# EAGLE board Light_Sensor_Layout (EAGLE 9.7.0)
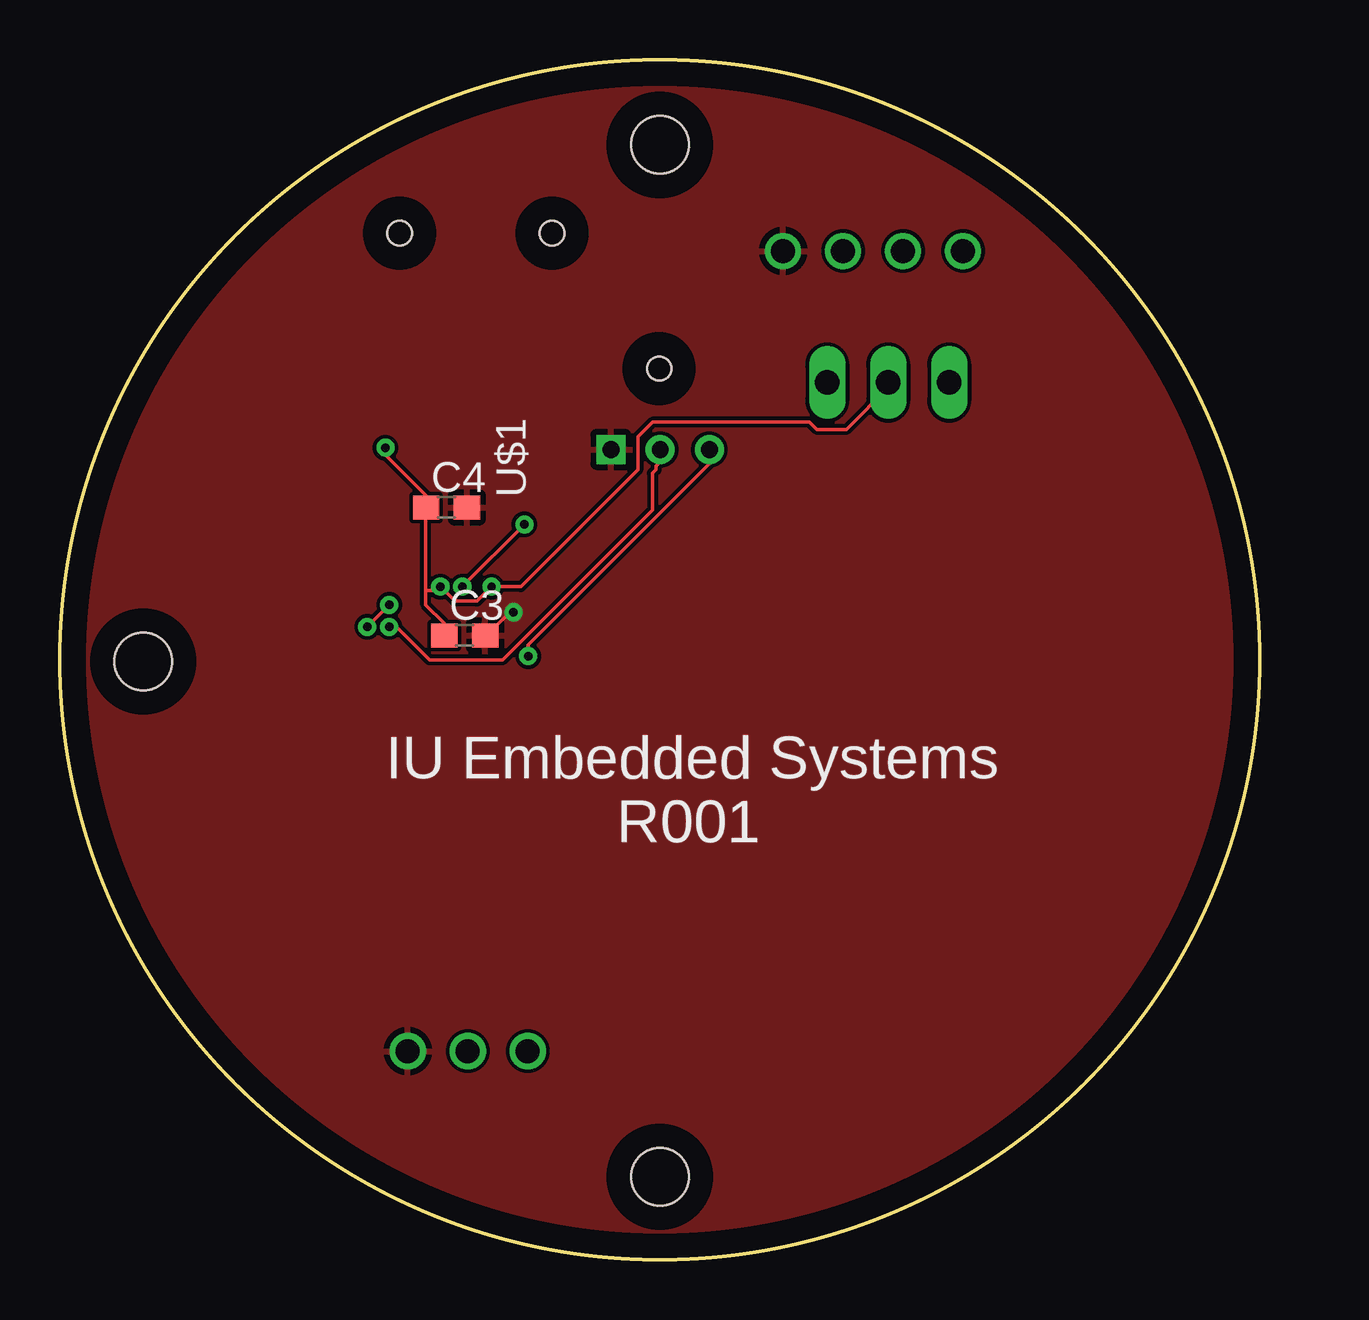
[diagram p0: board, top side]
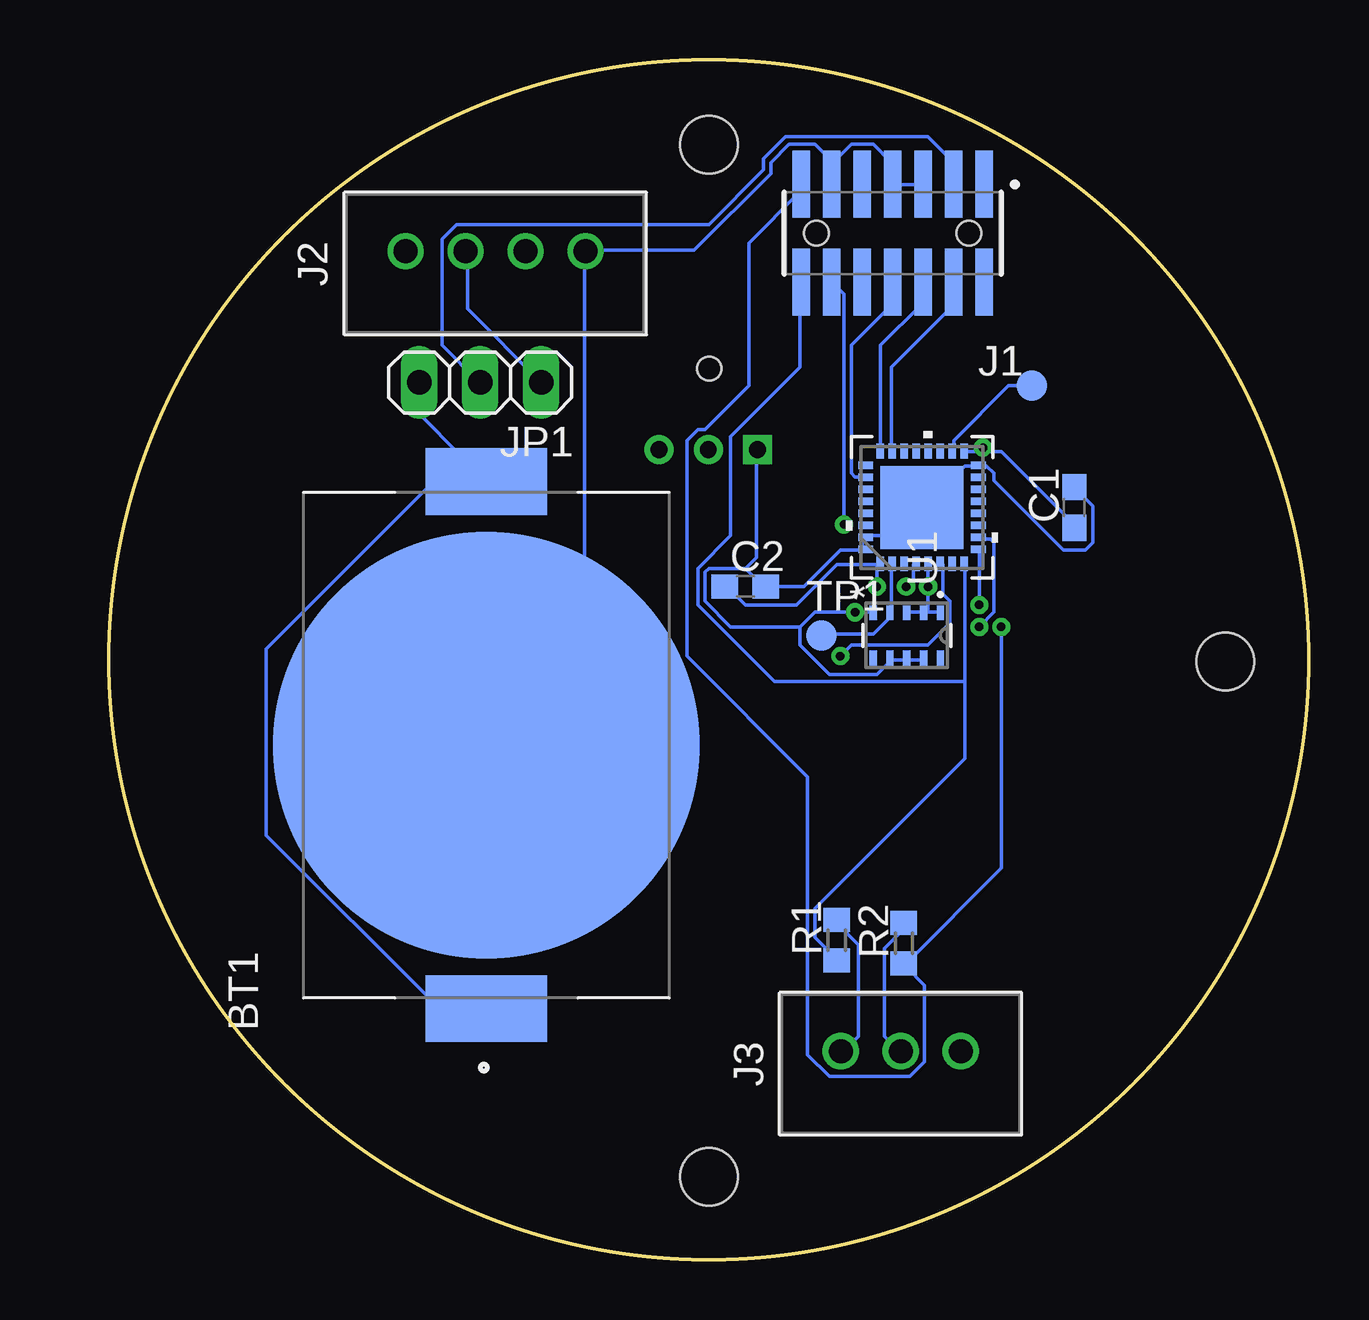
[diagram p1: board, bottom side, seen from below]

Size 50 x 50 mm. Coordinates in mm from the lower left corner, seen from the top.
Outline: circle at 25,25 radius 25
Copper layers (1*16): Top 0.035mm / dielectric 1.5mm / Bottom 0.035mm
Design rules "Fusion Electronics Design Rules": minimum track width 6mil, minimum drill 0.35mm, track to track 6mil, track to pad 6mil, pad to pad 6mil, via to via 6mil, smd to smd 6mil, copper to edge 40mil, drill to drill 6mil, minimum pad ring 10mil, minimum via ring 8mil, stop-mask expansion 4mil, vias tented up to drill 9999mil, thermal gap 10mil
Holes 2.4 mm at 25,46.46 3.47,24.93 25,3.45
Holes 1 mm at 24.97,37.14

## Footprints (pad centres in the part's own frame; a part is rotated, then mirrored left to right if it is on the bottom)
MPD_BK-912-TR = smd 2.79 x 5.08: 1 -10.985,0; 2 10.985,0 | smd 17.78 x 17.78: 3 0,0
C0603 = smd 1.1 x 1: 1 -0.85,0; 2 0.85,0
SAMTEC_FTSH-107-01-L-DV-A-TR = smd 0.74 x 2.79: 01 -3.81,-2.035; 02 -3.81,2.035; 03 -2.54,-2.035; 04 -2.54,2.035; 05 -1.27,-2.035; 06 -1.27,2.035; 07 0,-2.035; 08 0,2.035; 09 1.27,-2.035; 10 1.27,2.035; 11 2.54,-2.035; 12 2.54,2.035; 13 3.81,-2.035; 14 3.81,2.035 | hole 1.02: -3.175,0; 3.175,0
B4B-XH-A = drill 1: 1 0.525,3.75; 2 0.525,1.25; 3 0.525,-1.25; 4 0.525,-3.75
B3B-XH-A = drill 1: 1 0.525,2.5; 2 0.525,0; 3 0.525,-2.5
1X03 = drill 1.016 long: 1 -2.54,0; 2 0,0; 3 2.54,0
R0603 = smd 1 x 1.1: 1 -0.85,0; 2 0.85,0
B1,27 = smd 1.27 x 1.27: TP 0,0
UFQFPN32-5X5MM = smd 0.61 x 0.305: 1 -2.35,1.75; 2 -2.35,1.25; 3 -2.35,0.75; 4 -2.35,0.25; 5 -2.35,-0.25; 6 -2.35,-0.75; 7 -2.35,-1.25; 8 -2.35,-1.75; 17 2.35,-1.75; 18 2.35,-1.25; 19 2.35,-0.75; 20 2.35,-0.25; 21 2.35,0.25; 22 2.35,0.75; 23 2.35,1.25; 24 2.35,1.75 | smd 0.305 x 0.61: 9 -1.75,-2.35; 10 -1.25,-2.35; 11 -0.75,-2.35; 12 -0.25,-2.35; 13 0.25,-2.35; 14 0.75,-2.35; 15 1.25,-2.35; 16 1.75,-2.35; 25 1.75,2.35; 26 1.25,2.35; 27 0.75,2.35; 28 0.25,2.35; 29 -0.25,2.35; 30 -0.75,2.35; 31 -1.25,2.35; 32 -1.75,2.35 | smd 3.454 x 3.454: 33 0,0
TSL237 = drill 0.7 square: P$1 0,0 | drill 0.7: P$2 0,-2.05; P$3 0,-4.1
TG-3541CE_32.7680KXB3_EPS = smd 0.61 x 0.305: 1 -0.945,1.4; 2 -0.945,0.7; 3 -0.945,0; 4 -0.945,-0.7; 5 -0.945,-1.4; 6 0.945,-1.4; 7 0.945,-0.7; 8 0.945,0; 9 0.945,0.7; 10 0.945,1.4

## Placement (x,y rotation side)
BT1  BK-912-TR  [MPD_BK-912-TR]  34.27,21.44 90 bottom
C1  0.1uF  [C0603]  9.76,31.35 90 bottom
C2  0.1uF  [C0603]  23.48,28.05 0 bottom
C3  1uF  [C0603]  16.87,26.02 0 top
C4  0.1uF  [C0603]  16.11,31.35 0 top
J1  FTSH-107-01-L-DV-A-TR  [SAMTEC_FTSH-107-01-L-DV-A-TR]  17.33,42.78 180 bottom
J2  B4B-XH-A  [B4B-XH-A]  33.89,41.51 90 bottom
J3  B3B-XH-A  [B3B-XH-A]  17,8.16 90 bottom
JP1  [1X03]  34.52,36.56 180 bottom
R1  200  [R0603]  19.67,13.32 90 bottom
R2  200  [R0603]  16.87,13.19 90 bottom
TP1  TPB1,27  [B1,27]  20.3,26.02 0 bottom
TP2  TPB1,27  [B1,27]  11.54,36.43 0 bottom
U1  STM32L432KX  [UFQFPN32-5X5MM]  16.11,31.35 90 bottom
U$1  TSL237  [TSL237]  22.97,33.76 90 top
XTAL1  TG-3541CE_32.7680KXB3TG-3541CE_32.7680KXB3_EPS  [TG-3541CE_32.7680KXB3_EPS]  16.74,26.02 270 bottom

## Library data of the parts
BT1 = Embedded_Systems_Components v3; MANUFACTURER: MPD; PARTREV: H; STANDARD: Manufacturer Recommendations
C1-C4 = rcl; SPICEPREFIX: C
J1 = Embedded_Systems_Components v3; MANUFACTURER: Samtec; PARTREV: R; STANDARD: Manufacturer Recommendations
J2 = Connector; CATEGORY: Connectors; DATASHEET: https://www.jst-mfg.com/product/pdf/eng/eXH.pdf; DESCRIPTION: Connector Header Through Hole 4 position 0.098" (2.50mm); MANUFACTURER: JST Sales America Inc.; MPN: B4B-XH-A; OPERATING_TEMPERATURE: -25°C ~ 85°C; PACKAGE_SIZE: NA; PACKAGE_TYPE: Through Hole; PART_STATUS: Active; PITCH: 0.098" (2.50mm); ROHS: Compliant; SERIES: XH; SUBCATEGORY: Rectangular Connectors; TYPE: Male Headers
J3 = Connector; CATEGORY: Connectors; DATASHEET: https://www.jst-mfg.com/product/pdf/eng/eXH.pdf; DESCRIPTION: Connector Header Through Hole 3 position 0.098" (2.50mm); MANUFACTURER: JST Sales America Inc.; MPN: B3B-XH-A; OPERATING_TEMPERATURE: -25°C ~ 85°C; PACKAGE_SIZE: NA; PACKAGE_TYPE: Through Hole; PART_STATUS: Active; PITCH: 0.098" (2.50mm); ROHS: Compliant; SERIES: XH; SUBCATEGORY: Rectangular Connectors; TYPE: Male Headers
JP1 = pinhead
R1 R2 = rcl; SPICEPREFIX: R
TP1 TP2 = testpad
U1 = Embedded_Systems_Components v3; MANUFACTURER_PART_NUMBER: STM32L432KX; VENDOR: STMicroelectronics
U$1 = Embedded_Systems_Components v3
XTAL1 = Embedded_Systems_Components v3; COPYRIGHT: Copyright (C) 2023 Ultra Librarian. All rights reserved.; MANUFACTURER_PART_NUMBER: TG-3541CE 32.7680KXB3; MFR_NAME: Epson

## Nets
CLKOUT: TP2.TP U1.18
GND: BT1.3 C1.2 C2.2 C3.2 C4.2 J1.05 J1.07 J1.11 J2.4 J3.3 U1.16 U1.31 U1.32 U1.33 U$1.P$1 XTAL1.5 XTAL1.7 XTAL1.8 XTAL1.9
N$1: BT1.1 BT1.2 JP1.3
N$2: J2.2 JP1.1
N$5: J3.1 R1.2
N$6: J3.2 R2.2
NRST: J1.12 U1.4
OSC: TP1.TP U1.2 XTAL1.4
RX: J1.13 R2.1 U1.9
SWCLK: J1.06 U1.24
SWDIO: J1.04 U1.23
SWO: J1.08 U1.26
TSL237_EN: U1.10 U$1.P$2
TSL237_IN: U1.6 U$1.P$3
TX: J1.14 R1.1 U1.8
VCC: C1.1 C2.1 C3.1 C4.1 J1.03 JP1.2 U1.1 U1.5 U1.17 XTAL1.1 XTAL1.2 XTAL1.3

## Tracks (layer width: path | path; a pad name or v marks a point on that pad's centre or on a via)
CLKOUT
  Bottom 0.152: TP2.TP 12.5,36.43 14.79,34.14 14.79,33.84 U1.18
GND  (via drill 0.35)
  Top 0.152: v18.9,26.98 18.75,26.98 17.84,26.07 C3.2
  Bottom 0.152: J1.05 16.16,44.81 17.23,44.81 J1.07 17.38,44.96 17.38,45.73 18.14,46.49 19.06,46.49 19.82,45.73 | 19.82,45.73 19.82,44.96 J1.11 19.82,45.73 | 19.82,45.73 20.58,46.49 21.65,46.49 22.41,45.73 22.41,45.27 25.61,42.07 30.03,42.07 J2.4 30.18,41.92 30.18,25.46 34.14,21.5 BT1.3 | XTAL1.9 16.16,25 16.62,25 XTAL1.8 16.77,25 17.38,25 | 21.19,26.37 20.58,26.98 v18.9,26.98 18.29,26.98 XTAL1.5 | 21.19,26.37 21.19,25.61 19.97,24.39 17.99,24.39 17.38,25 | 17.38,25 XTAL1.7 | C1.2 9.76,32.16 9,31.4 9,29.88 9.3,29.57 10.22,29.57 13.11,32.47 13.11,32.77 13.42,33.08 13.72,33.08 U1.16 13.88,33.08 14.33,33.08 16.01,31.4 U1.33 16.16,31.25 17.23,30.18 18.45,30.18 U1.31 18.6,30.03 18.6,29.72 U1.32 18.6,29.57 19.51,29.57 21.04,28.05 C2.2 22.71,28.05 23.48,28.81 | 21.19,26.37 24.09,26.37 25.15,27.44 25.15,28.66 25,28.81 23.48,28.81 | 23.48,28.81 23.02,29.27 23.02,33.69 U$1.P$1
  pour Top: -18.1,-16.83 70.64,-16.83 70.64,55.4 -18.1,55.4
N$1
  Bottom 0.152: 35.36,33.53 34.3,32.47 BT1.2 35.36,33.53 | 35.36,33.53 37.04,35.21 37.04,36.43 JP1.3 | 35.36,33.53 43.44,25.46 43.44,17.68 36.28,10.52 34.3,10.52 BT1.1
N$2
  Bottom 0.152: JP1.1 35.06,39.63 35.06,41.92 J2.2
N$5
  Bottom 0.152: R1.2 19.67,14.03 18.75,13.11 18.75,9.3 19.36,8.69 J3.1
N$6
  Bottom 0.152: R2.2 16.92,14.03 16.92,13.72 17.68,12.96 17.68,9.3 17.07,8.69 J3.2
NRST  (via drill 0.35)
  Top 0.152: v19.36,30.64 v16.77,28.05
  Bottom 0.152: v16.77,28.05 16.47,28.35 16.47,28.96 U1.4 | v19.36,30.64 19.36,40.24 19.82,40.7 J1.12
OSC
  Bottom 0.152: U1.2 17.38,28.96 17.38,26.98 XTAL1.4 17.38,26.83 18.14,26.07 20.28,26.07 TP1.TP
RX  (via drill 0.35)
  Top 0.152: v12.81,26.37 v13.72,27.29
  Bottom 0.152: v13.72,27.29 13.72,29.57 U1.9 | v12.81,26.37 12.81,16.31 16.77,12.35 R2.1 16.77,12.2 16.01,11.44 16.01,8.24 16.62,7.63 19.97,7.63 20.88,8.54 20.88,20.12 25.91,25.15 25.91,34.14 25.46,34.6 25.15,34.6 23.32,36.43 23.32,42.37 21.19,44.51 21.19,44.81 J1.13
SWCLK
  Bottom 0.152: U1.24 17.84,33.84 17.84,38.11 16.16,39.78 16.16,40.7 J1.06
SWDIO
  Bottom 0.152: U1.23 17.38,33.84 17.38,37.19 14.94,39.63 14.94,40.7 J1.04
SWO
  Bottom 0.152: U1.26 18.6,32.62 18.9,32.62 19.06,32.77 19.06,38.11 17.38,39.78 17.38,40.7 J1.08
TSL237_EN  (via drill 0.35)
  Top 0.152: v13.72,26.37 14.03,26.37 15.4,25 18.45,25 24.7,31.25 24.7,32.77 24.85,32.92 24.85,33.08 25,33.23 25,33.69 U$1.P$2
  Bottom 0.152: v13.72,26.37 13.11,26.98 13.11,29.88 13.27,30.03 13.72,30.03 U1.10
TSL237_IN  (via drill 0.35)
  Top 0.152: v19.51,25.15 19.51,25.61 27.13,33.23 27.13,33.69 U$1.P$3
  Bottom 0.152: v19.51,25.15 19.06,25.61 15.86,25.61 14.94,26.52 14.94,27.44 15.25,27.74 15.25,28.96 U1.6
TX
  Bottom 0.152: 14.33,24.09 14.33,20.88 20.58,14.64 20.58,13.42 19.67,12.5 R1.1 | 14.33,24.09 14.33,28.96 U1.8 | 14.33,24.09 22.26,24.09 25.46,27.29 25.46,28.81 24.09,30.18 24.09,34.3 21.19,37.19 21.19,40.7 J1.14
VCC  (via drill 0.35)
  Top 0.152: 15.25,27.9 15.25,27.29 16.01,26.52 16.01,26.07 C3.1 | 15.25,27.9 15.25,31.25 C4.1 15.25,31.4 15.25,31.86 13.57,33.53 v13.57,33.84 | 15.25,27.9 15.7,27.9 v15.86,28.05 16.47,27.44 17.38,27.44 v17.99,28.05 19.21,28.05 24.09,32.92 24.09,34.3 24.7,34.91 31.25,34.91 31.55,34.6 32.77,34.6 34.6,36.43 JP1.2
  Bottom 0.152: 13.57,33.69 12.81,33.69 9.76,30.64 C1.1 | 13.57,33.69 14.33,33.69 U1.17 | 15.86,26.98 16.01,26.98 XTAL1.2 16.16,26.98 16.62,26.98 XTAL1.3 | 15.86,26.98 15.4,26.98 XTAL1.1 | 15.86,26.98 v15.86,28.05 15.86,28.96 U1.5 | 17.99,28.96 19.67,28.96 21.34,27.29 23.48,27.29 24.24,28.05 C2.1 | 17.99,28.96 v17.99,28.05 | 17.99,28.96 U1.1 | v13.57,33.84 13.57,33.69 | J1.03 14.94,44.96 14.94,45.88 15.86,46.79 21.8,46.79 22.71,45.88 22.71,45.42 25,43.14 35.52,43.14 36.12,42.53 36.12,38.11 34.6,36.58 JP1.2

## Text on the board
tNames: IU Embedded Systems / R001